# Altium PCB nrf52811_qfaa_dcdc.PcbDoc
Units mm, origin at the board's own origin, x right, y up, seen from the top; angles counter-clockwise.
Board outline 30.48 x 38.1 mm, 2 copper layers (Top Layer, Bottom Layer), stack 1.671 mm thick; 19 components, 46 nets, 122 pads, 60 vias.
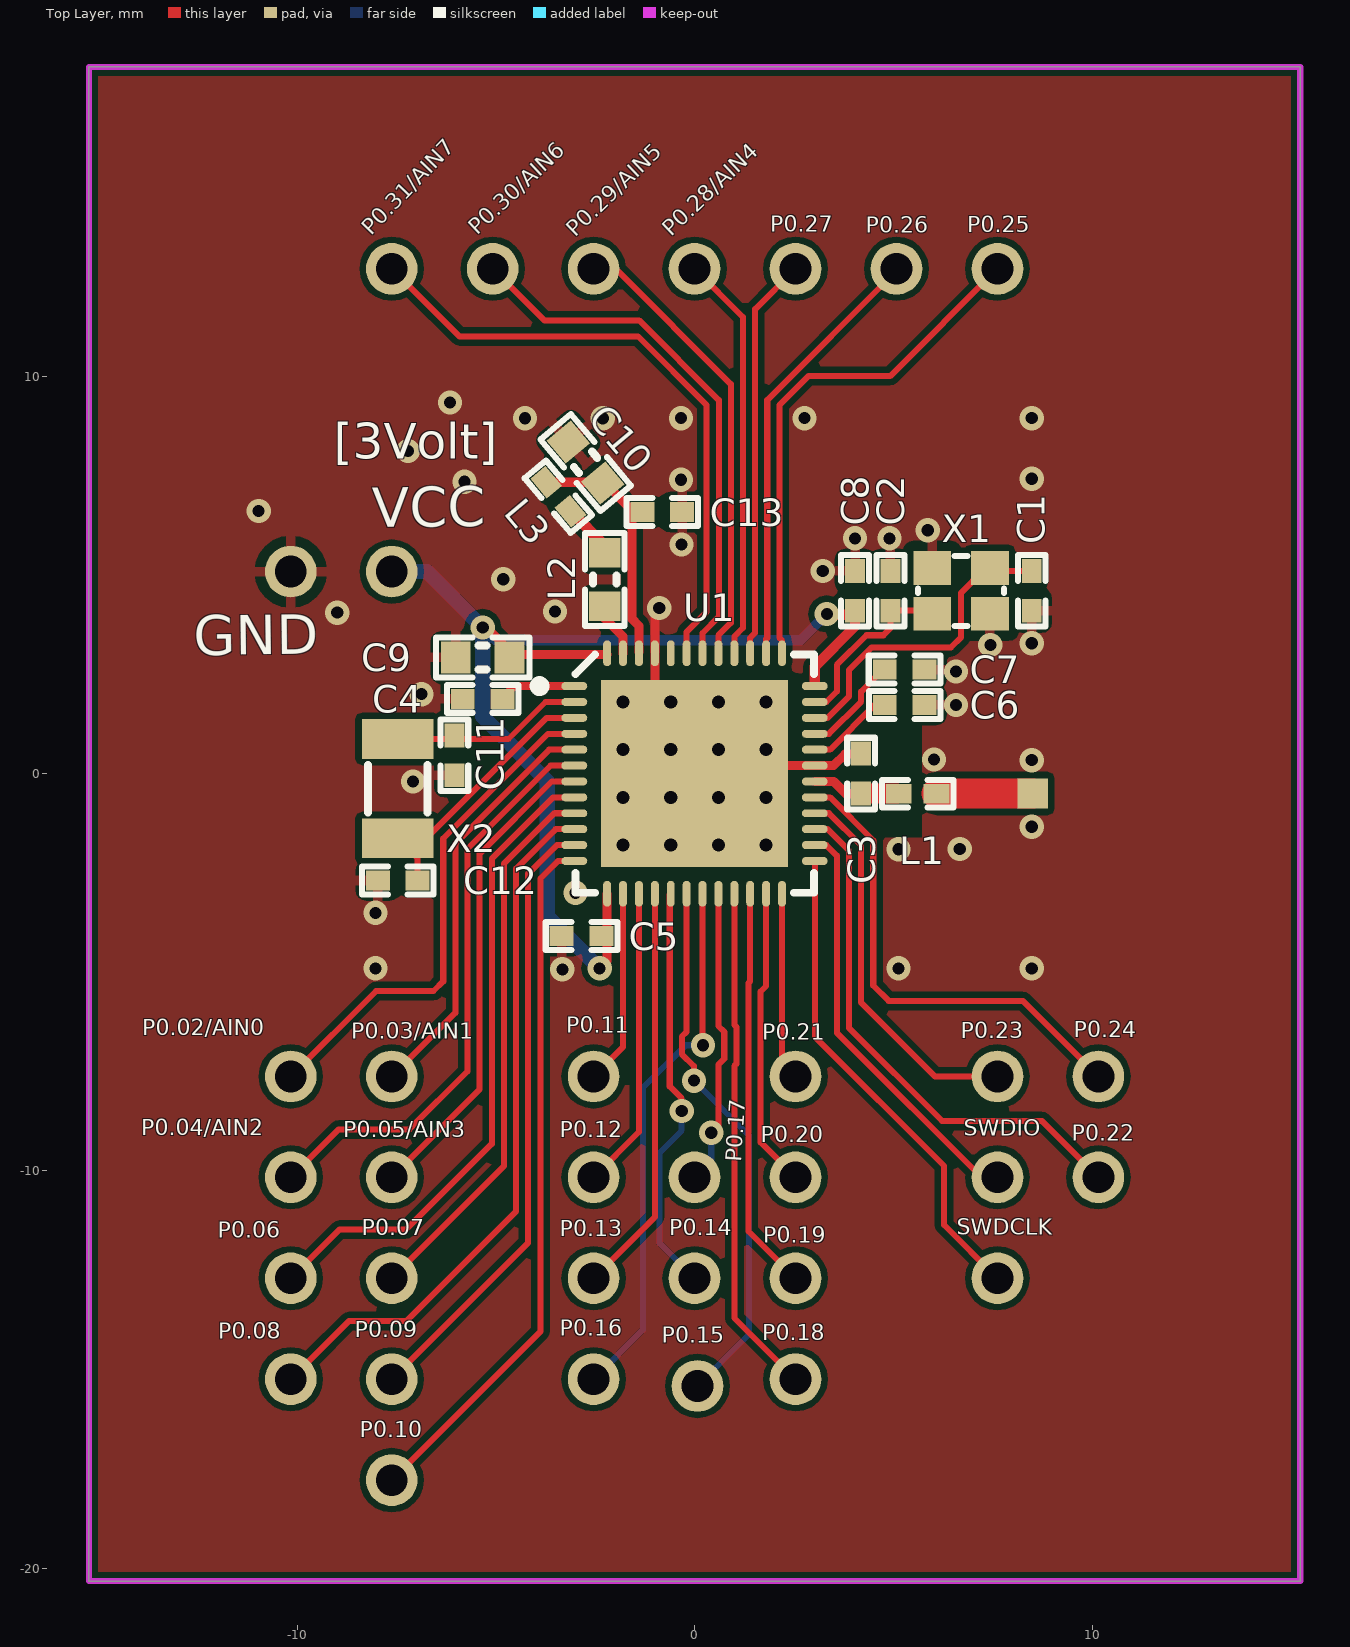
[diagram p0: Top Layer view]
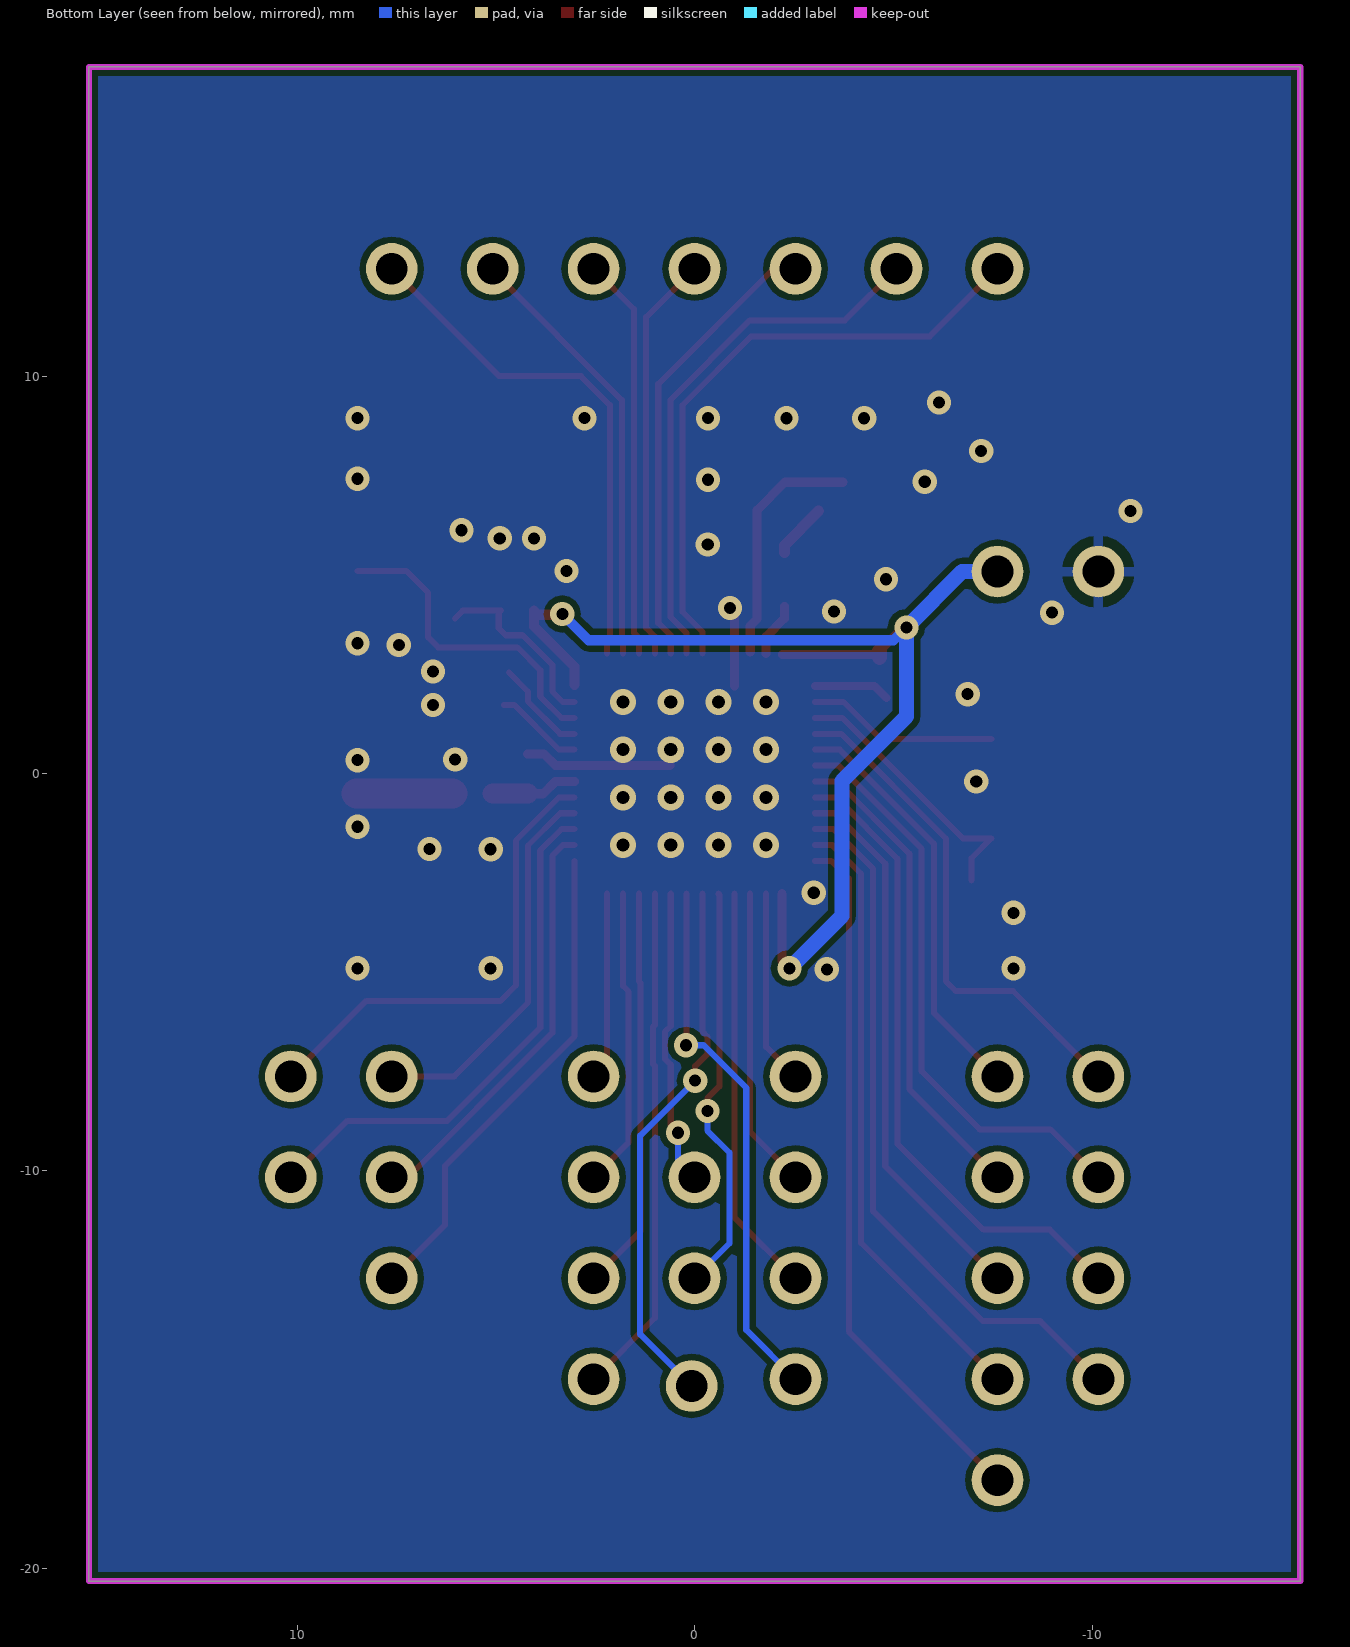
[diagram p1: Bottom Layer view, seen from below]
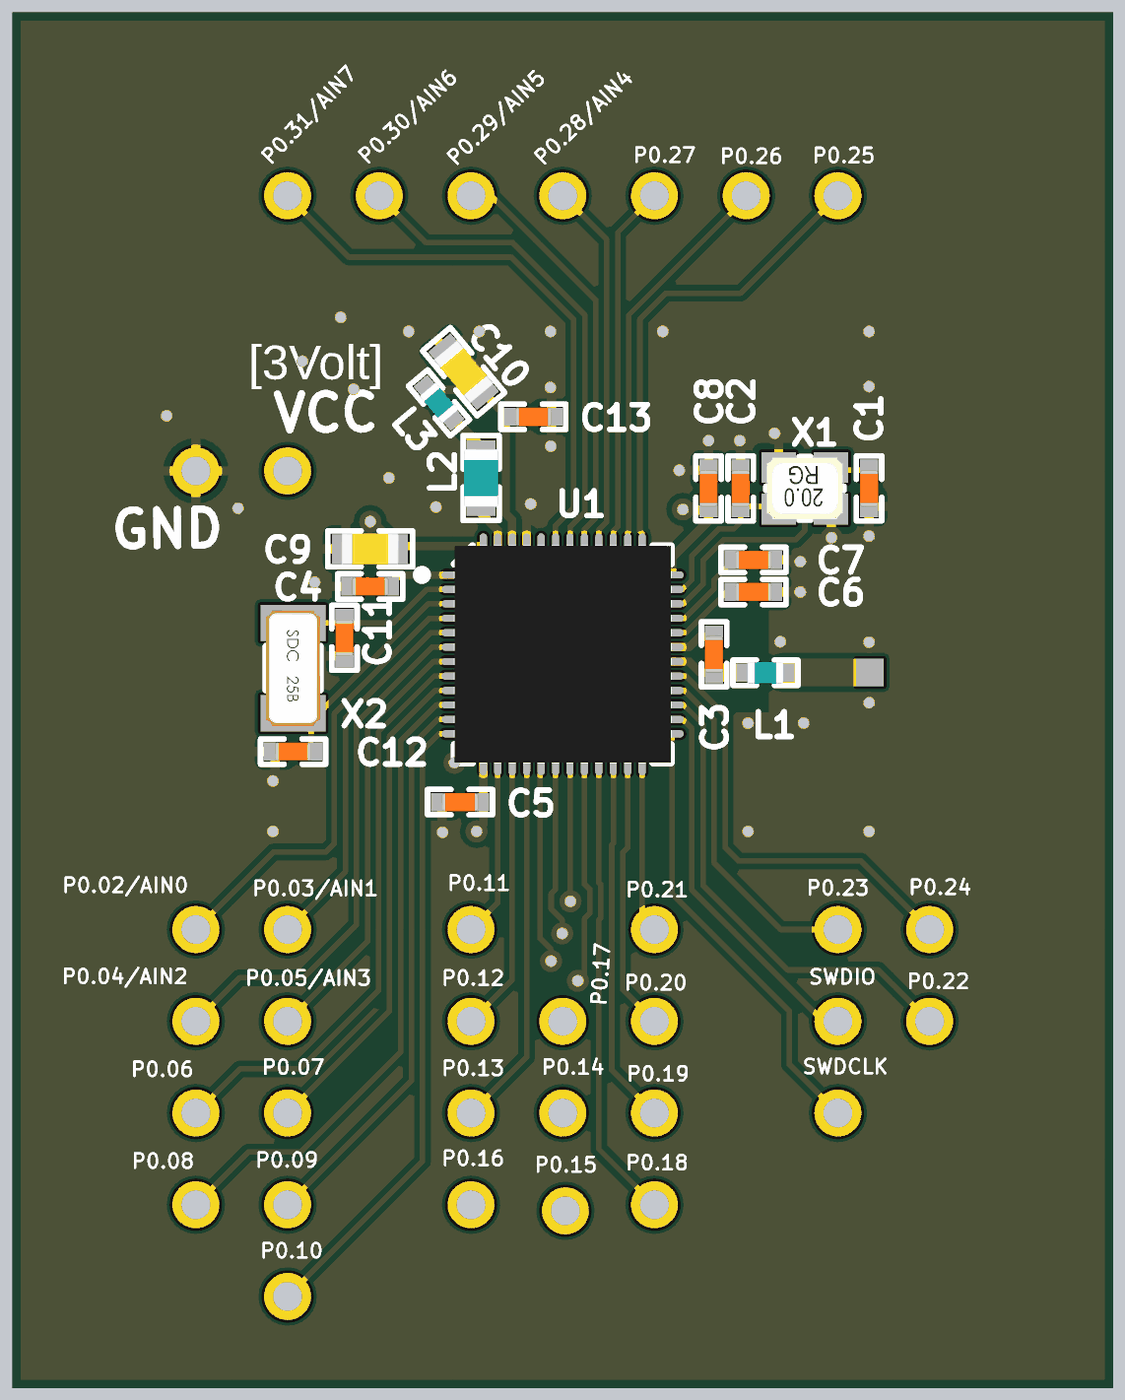
[diagram p2: 3D render of the assembled board from above, using the file's embedded part models]

## Layer stack, top to bottom
Top Solder: solder mask 0.0102, Solder Resist, Dk 3.5
Top Layer: signal copper 0.0356
Dielectric1: core 1.6002, FR-4, Dk 4.8
Bottom Layer: signal copper 0.0356
Bottom Solder: solder mask 0.0102, Solder Resist, Dk 3.5

## Board outline
-15.24,-20.32 -15.24,17.78 15.24,17.78 15.24,-20.32

## Design rules (kind name [scope] priority, off if disabled: settings)
Clearance Polygon_ANT [(InNamedPolygon('Top_Layer-GND')) or (InNamedPolygon('Bottom_Layer-GND')) vs InNet('RF')] p1: gap=0.127 ignorepadtopadclearanceinfootprint=FALSE except(0: Arc-Hole Track-Hole SMDPad-Hole THPad-Hole Via-Hole Fill-Hole Poly-Hole Region-Hole Text-Hole)
Clearance Polygon [(InNamedPolygon('Top_Layer-GND')) or (InNamedPolygon('Bottom_Layer-GND'))] p2: gap=0.254 ignorepadtopadclearanceinfootprint=FALSE except(0: Arc-Hole Track-Hole SMDPad-Hole THPad-Hole Via-Hole Fill-Hole Poly-Hole Region-Hole Text-Hole)
Clearance [All] p3: gap=0.152 ignorepadtopadclearanceinfootprint=FALSE except(0: Arc-Hole Track-Hole SMDPad-Hole THPad-Hole Via-Hole Fill-Hole Poly-Hole Region-Hole Text-Hole)
ComponentClearance [All] p1 off: gap=0.254 collisioncheckmode=3 verticalgap=0.254 showdistances=FALSE
FabricationTestPointUsage TestPointUsage [All] p1: valid=0 allowmultiple=FALSE
FabricationTestpoint Testpoint [All] p1: side=3 testpointundercomponent=TRUE minsize=1.016 maxsize=2.54 preferedsize=1.524 minholesize=0 maxholesize=1.016 preferedholesize=0.813 testpointgrid=0.025 allowsidetop=TRUE allowsidebottom=TRUE usegrid=TRUE gridtolerance=0
Height [All] p1 off: minheight=0 maxheight=25.4 prefheight=12.7
HoleSize [All] p1: absolutevalues=TRUE maxlimit=4.064 minlimit=0.305 maxpercent=80.000 minpercent=20.000
MinimumAnnularRing [All] p1 off: minimumring=0.152
PolygonConnect PolygonConnect_1 [isVia and innet(gnd)] p1: connectstyle=Direct reliefconductorwidth=0.254 reliefentries=4 polygonreliefangle="90 Angle" airgapwidth=0.254
PolygonConnect [All] p2: connectstyle=Relief reliefconductorwidth=0.254 reliefentries=4 polygonreliefangle="90 Angle" airgapwidth=0.254
RoutingVias [All] p1: holewidth=0.406 width=0.813 viastyle="Through Hole" minholewidth=0.254 minwidth=0.254 maxholewidth=0.711 maxwidth=1.27
SilkToSolderMaskClearance SilkscreenOverComponentPads [IsPad] p1: minsilkscreentomaskgap=0.254 clearancetoexposedcopper=TRUE
SolderMaskExpansion [All] p1: expansion=0.076
Width [All] p1: maxlimit=2.54 minlimit=0.152 preferedwidth=0.381 minimp=50.000000 maximp=50.000000 favimp=50.000000
24 further rules are at their usual default settings.

## Components (designator, comment, footprint, x,y, rotation, side; value= is the part's Value field where it differs from the comment)
C1 "12pF" CAPC1005X04L 8.483,4.598 r270 top
C2 "12pF" CAPC1005X04L 4.927,4.598 r90 top
C3 "0.8pF" CAPC1005X04L 4.191,0 r270 top
C4 "100nF" CAPC1005X04L -5.334,1.88 r180 top
C5 "100nF" CAPC1005X04L -2.845,-4.089 r180 top
C6 "N.C." CAPC1005X04L 5.283,1.727 r180 top
C7 "100pF" CAPC1005X04L 5.283,2.616 r0 top
C8 "100nF" CAPC1005X04L 4.038,4.598 r90 top
C9 "4.7µF" CAPC1608X06L -5.334,2.921 r180 top
C10 "1.0µF" CAPC1608X06L -2.742,7.828 r310 top
C11 "12pF" CAPC1005X04L -6.045,0.457 r270 top
C12 "12pF" CAPC1005X04L -7.468,-2.692 r180 top
C13 "N.C." CAPC1005X04L -0.813,6.579 r0 top
L1 "3.9nH" INDC1005X04L 5.613,-0.508 r0 top
L2 "10µH" INDC1608X06L -2.261,4.882 r270 top
L3 "15nH" INDC1005X04L -3.428,6.965 r310 top
U1 "nRF52811-QFAA" QFN40P600X600X90-48N 0,0 r0 top locked
X1 "32MHz" BT-XTAL_2016 6.705,4.598 r180 top
X2 "32.768kHz" XTAL_3215 -7.468,-0.381 r270 top

## Footprints (in the part's own frame and the unit in brackets; to place one, negate y for a bottom-side part, rotate by r counter-clockwise, add the part's x,y. Pads: shape width x height; smd on the part's side, far side on the other; paste and mask are expansions set on the pad)
BT-XTAL_2016 [mm] "Crystal 2.0 x 1.6 mm"
  rect 0.95x0.85 smd: 1(-0.725,-0.575) 2(0.725,-0.575) 3(0.725,0.575) 4(-0.725,0.575)
  silkscreen extent -1.08,-0.88 1.08,0.88, body extent -1.05,-0.85 1.05,0.85, height 0.56
CAPC1005X04L [mm] "Chip Capacitor, 2-Leads, Body 1.0x0.5mm, IPC High Density"
  rect 0.6x0.5 smd: 1(-0.5,0) 2(0.5,0)
  silkscreen extent -0.9,-0.35 0.9,0.35, body extent -0.51,-0.25 0.51,0.25, height 0.5
CAPC1608X06L [mm] "Chip Capacitor, 2-Leads, Body 1.6x0.8mm, IPC High Density"
  rect 0.75x0.8 smd: 1(-0.675,0) 2(0.675,0)
  silkscreen extent -1.17,-0.5 1.17,0.5, body extent -0.8,-0.43 0.8,0.43, height 0.8
INDC1005X04L [mm] "Chip Inductor, 2-Leads, Body 1.0x0.5mm, IPC High Density"
  rect 0.65x0.5 smd: 1(-0.475,0) 2(0.475,0)
  silkscreen extent -0.9,-0.35 0.9,0.35, body extent -0.5,-0.3 0.5,0.3, height 0.5
INDC1608X06L [mm] "Chip Inductor, 2-Leads, Body 1.6x0.8mm, IPC High Density"
  rect 0.75x0.8 smd: 1(-0.675,0) 2(0.675,0)
  silkscreen extent -1.17,-0.5 1.17,0.5, body extent -0.8,-0.48 0.8,0.48, height 0.8
QFN40P600X600X90-48N [mm] "QFN, 48-Leads, Body 6,0x6,0mm (max), Pitch 0,40mm, IPC Medium Density"
  oval 0.65x0.2 smd: 1(-3.025,2.2) 2(-3.025,1.8) 3(-3.025,1.4) 4(-3.025,1) 5(-3.025,0.6) 6(-3.025,0.2) 7(-3.025,-0.2) 8(-3.025,-0.6) 9(-3.025,-1) 10(-3.025,-1.4) 11(-3.025,-1.8) 12(-3.025,-2.2) 25(3.025,-2.2) 26(3.025,-1.8) 27(3.025,-1.4) 28(3.025,-1) 29(3.025,-0.6) 30(3.025,-0.2) 31(3.025,0.2) 32(3.025,0.6) 33(3.025,1) 34(3.025,1.4) 35(3.025,1.8) 36(3.025,2.2)
  oval 0.2x0.65 smd: 13(-2.2,-3.025) 14(-1.8,-3.025) 15(-1.4,-3.025) 16(-1,-3.025) 17(-0.6,-3.025) 18(-0.2,-3.025) 19(0.2,-3.025) 20(0.6,-3.025) 21(1,-3.025) 22(1.4,-3.025) 23(1.8,-3.025) 24(2.2,-3.025) 37(2.2,3.025) 38(1.8,3.025) 39(1.4,3.025) 40(1,3.025) 41(0.6,3.025) 42(0.2,3.025) 43(-0.2,3.025) 44(-0.6,3.025) 45(-1,3.025) 46(-1.4,3.025) 47(-1.8,3.025) 48(-2.2,3.025)
  rect 4.7x4.7 smd: 49(0,0)
  silkscreen extent -4.02,-3 3,3, body extent -3.02,-3.02 3.02,3.02, height 0.86
XTAL_3215 [mm] "XTAL SMD 3.2 x 1.5 mm"
  rect 1x1.8 smd: 1(-1.25,0) 2(1.25,0)
  silkscreen extent -0.6,-0.75 0.6,0.75, body extent -1.6,-0.75 1.6,0.75, height 0.81

## Part data
C1 C2 C11 C12: library part C0402-12p, "Capacitor, NP0, ±2%", Footprint Doc=0402, LatestRevisionDate=2011-05-11, Note=50V, Part Number=C0402-12p, Pin Count=2, Published=2009-05-08, Publisher="Nordic Semiconductor"
C3: library part C0402-0.8p, "Capacitor, NP0, ±5%", Footprint Doc=0402, LatestRevisionDate=2012-11-21, Note=50V, Part Number=C0402-0.8p, Pin Count=2, Published=2009-05-08, Publisher="Nordic Semiconductor"
C4 C5 C8: library part C0402-100n, "Capacitor, X7R, ±10%", Footprint Doc=0402, LatestRevisionDate=2009-11-23, Note=16V, Part Number=C0402-100n, Pin Count=2, Published=2009-05-08, Publisher="Nordic Semiconductor"
C6 C13: library part C0402-N.C., "Not mounted", Assembly="Not mounted", Footprint Doc=0402, LatestRevisionDate=2009-05-08, Part Number=C0402-N.C., Pin Count=2, Published=2009-05-08, Publisher="Nordic Semiconductor"
C7: library part C0402-100p, "Capacitor, NP0, ±5%", Footprint Doc=0402, LatestRevisionDate=2009-05-08, Note=50V, Part Number=C0402-100p, Pin Count=2, Published=2009-05-08, Publisher="Nordic Semiconductor"
C9: library part C0603-4µ7, "Capacitor, X5R, ±10%", Footprint Doc=0603, LatestRevisionDate=2009-11-23, Note=6.3V, Part Number=C0603-4µ7, Pin Count=2, Published=2009-05-08, Publisher="Nordic Semiconductor"
C10: library part C0603-1µ0, "Capacitor, X7R, ±10%", Footprint Doc=0603, LatestRevisionDate=2013-06-05, Note=16V, Part Number=C0603-1µ0, Pin Count=2, Published=2009-05-08, Publisher="Nordic Semiconductor"
L1: library part L0402-3n9, "High frequency chip inductor ±5%", Footprint Doc=0402, LatestRevisionDate=2012-09-19, Part Number=L0402-3n9, Pin Count=2, Published=2009-05-08, Publisher="Nordic Semiconductor"
L2: library part L0603-10µ, "Chip inductor, IDC,min = 50 mA, ±20%", Footprint Doc=0603, LatestRevisionDate=2012-09-19, Part Number=L0603-10µ, Pin Count=2, Published=2010-02-24, Publisher="Nordic Semiconductor"
L3: library part L0402-15n, "High frequency chip inductor ±10%", Footprint Doc=0402, LatestRevisionDate=2012-09-19, Part Number=L0402-15n, Pin Count=2, Published=2010-07-12, Publisher="Nordic Semiconductor"
U1: library part nRF52811-QFAAA0, "Multi-protocol Bluetooth Low Energy, IEEE 802.15.4, ANT and 2.4GHz proprietary system-on-chip", Manufacturer="Nordic Semiconductor", Part number IPS=N.A., Artikkelnr Noca=N.A., ComponentLink1Description=Datasheet, ComponentLink2Description="Supplier link", Footprint Doc=QFN-48, LatestRevisionDate=2019-01-30, Manufacturer Part Number=nRF52811-QFAAA0, Note="nRF52811 - QFN48 6x6 0.4mm pitch", Part Number=nRF52811-QFAAA0, Pin Count=48, Published=2019-01-30, Publisher="Nordic Semiconductor", Supplier 1="Nordic Semiconductor", Supplier Part Number 1=nRF52811-QFAAA0
X1: library part XTAL_SMD2016_32MHz_8pF_General, "XTAL SMD 2016, 32MHz, Cl=8pF, Total Tol: ±40ppm", Footprint Doc=XTAL_2016, LatestRevisionDate=2016-08-19, Part Number=XTAL_SMD2016_32MHz_8pF_General, Pin Count=4, Published=2016-08-19, Publisher="Nordic Semiconductor"
X2: library part XTAL_SMD3215_32.768kHz_9pF_General, "XTAL SMD 3215, 32.768kHz, Cl=9pF, Total Tol: ±50ppm", Footprint Doc=XTAL_3215, LatestRevisionDate=2016-08-19, Part Number=XTAL_SMD3215_32.768kHz_9pF_General, Pin Count=2, Published=2016-08-19, Publisher="Nordic Semiconductor"

## Free pads (board coordinates)
  rect 0.762x0.762 smd: 0(8.509,-0.502)
  round 1.3 hole 0.8: 3(-10.16,-15.24) 3(-10.16,-12.7) 3(-10.16,-10.16) 3(-10.16,-7.62) 3(-10.16,5.08) 3(-7.62,-17.78) 3(-7.62,-15.24) 3(-7.62,-12.7) 3(-7.62,-10.16) 3(-7.62,-7.62) 3(-7.62,5.08) 3(-7.62,12.7) 3(-5.08,12.7) 3(-2.54,-15.24) 3(-2.54,-12.7) 3(-2.54,-10.16) 3(-2.54,-7.62) 3(-2.54,12.7) 3(0,-12.7) 3(0,-10.16) 3(0,12.7) 3(0.073,-15.409) 3(2.54,-15.24) 3(2.54,-12.7) 3(2.54,-10.16) 3(2.54,-7.62) 3(2.54,12.7) 3(5.08,12.7) 3(7.62,-12.7) 3(7.62,-10.16) 3(7.62,-7.62) 3(7.62,12.7) 3(10.16,-10.16) 3(10.16,-7.62)

## Via types
v1: diameter 0.61, hole 0.305, Top Layer to Bottom Layer, tented both sides, 44 vias
v2: diameter 0.66, hole 0.33, Top Layer to Bottom Layer, tented both sides, 16 vias

## Nets (pads, with @x,y where several pads share a name; then routed paths per layer and width w, separated by ;. In a path a pad name is that pad's centre, name@x,y a point inside that pad or via, vN(x,y) a via of type N, cw(c..) or ccw(c..) an arc to the next point about the centre after c; other vN are vias at no path point)
DEC1: C4.1 U1.1 | length 1.9
  Top Layer w0.203: C4.1@-4.83,1.899 -4.529,2.2 U1.1
DEC2: C6.2 U1.32 | length 2.2
  Top Layer w0.152: U1.32 3.411,0.6 4.538,1.727 C6.2 C6.2@4.801,1.727
DEC3: C7.1 U1.33 | length 2.4
  Top Layer w0.152: U1.33 3.38,1 4.191,1.811 4.191,2.062 C7.1@4.675,2.546
DEC4: C10.2 C13.1 L3.1 U1.46 | length 6.1
  Top Layer w0.229: L3.1 -2.274,7.329 -1.575,6.629 -1.575,3.891 -1.4,3.717 U1.46@-1.4,3.056
GND: C1.2 C2.2 C3.1 C4.2 C5.2 C6.1 C7.2 C8.2 C9.2 C10.1 C11.2 C12.2 C13.2 pad.3@-10.16,5.08 U1.31 U1.45 U1.49 X1.2 X1.4 | length 5.6
  Top Layer w0.229: U1.49@-1,2.2 U1.45 v1@-1,4.14 ; U1.49@0.618,0.203 3.499,0.203 3.786,0.49 C3.1@4.199,0.49
  other v1: -3.327,-4.928 -8.026,-4.902 5.131,-4.902 8.484,-4.902 -8.026,-3.505 -2.997,-3 5.131,-1.905 6.671,-1.901 8.484,-1.34 -7.087,-0.203 8.484,0.337 6.024,0.35 6.579,1.727 -6.871,1.996 6.579,2.565 7.442,3.231 8.483,3.277 -8.992,4.047 -3.511,4.08 -0.889,4.166 -4.814,4.888 3.226,5.098 -0.33,5.766 4.039,5.918 4.902,5.918 5.867,6.122 -10.969,6.609 -5.791,7.341 -0.34,7.391 8.484,7.417 -7.21,8.119 -4.267,8.941 -2.311,8.941 -0.34,8.941 2.769,8.941 8.484,8.941 -6.151,9.333
  other v2: -1.8,-1.8 -0.6,-1.8 0.6,-1.8 1.8,-1.8 -1.8,-0.6 -0.6,-0.6 0.6,-0.6 1.8,-0.6 -1.8,0.6 -0.6,0.6 0.6,0.6 1.8,0.6 -1.8,1.8 -0.6,1.8 0.6,1.8 1.8,1.8
NetC3_2: C3.2 L1.1 U1.30 | length 2.2
  Top Layer w0.229: U1.30 3.5,-0.2 3.81,-0.51 C3.2@4.199,-0.51
  Top Layer w0.508: C3.2@4.191,-0.505 L1.1@5.088,-0.505
NetL2_1: L2.1 L3.2 | length 1.4
  Top Layer w0.279: L3.2 -2.261,5.738 L2.1
NetL2_2: L2.2 U1.47 | length 1.4
  Top Layer w0.229: L2.2 -2.261,3.905 -1.8,3.445 U1.47
P0.00/XL1: C11.1 U1.2 X2.1 | length 4.8
  Top Layer w0.152: X2.1 -4.683,0.869 -3.752,1.8 U1.2
P0.01/XL2: C12.1 U1.3 X2.2 | length 7
  Top Layer w0.152: C12.1 -6.968,-2.131 X2.2 -6.752,-1.631 -3.721,1.4 U1.3
P0.02/AIN0: pad.3@-10.16,-7.62 U1.4 | length 12.8
  Top Layer w0.152: pad.3@-10.16,-7.62 -8.012,-5.472 -6.569,-5.472 -6.325,-5.228 -6.325,-1.636 -3.689,1 U1.4
P0.03/AIN1: pad.3@-7.62,-7.62 U1.5 | length 10.5
  Top Layer w0.152: pad.3@-7.62,-7.62 -6.019,-6.019 -6.019,-1.762 -3.657,0.6 U1.5
P0.04/AIN2: pad.3@-10.16,-10.16 U1.6 | length 14.7
  Top Layer w0.152: pad.3@-10.16,-10.16 -8.955,-8.955 -7.174,-8.955 -5.714,-7.495 -5.714,-1.889 -3.625,0.2 U1.6
P0.05/AIN3: pad.3@-7.62,-10.16 U1.7 | length 12.2
  Top Layer w0.152: pad.3@-7.62,-10.16 -5.406,-7.946 -5.406,-2.016 -3.591,-0.2 U1.7
P0.06: pad.3@-10.16,-12.7 U1.8 | length 16.3
  Top Layer w0.152: pad.3@-10.16,-12.7 -8.938,-11.478 -7.264,-11.478 -5.102,-9.316 -5.102,-2.142 -3.56,-0.6 U1.8
P0.07: pad.3@-7.62,-12.7 U1.9 | length 13.9
  Top Layer w0.152: pad.3@-7.62,-12.7 -4.797,-9.877 -4.797,-2.268 -3.529,-1 U1.9
P0.08: pad.3@-10.16,-15.24 U1.10 | length 17.9
  Top Layer w0.152: pad.3@-10.16,-15.24 -8.7,-13.78 -7.257,-13.78 -4.492,-11.015 -4.492,-2.395 -3.497,-1.4 U1.10
P0.09: pad.3@-7.62,-15.24 U1.11 | length 15.6
  Top Layer w0.152: pad.3@-7.62,-15.24 -4.187,-11.807 -4.187,-2.521 -3.466,-1.8 U1.11
P0.10: pad.3@-7.62,-17.78 U1.12 | length 17.7
  Top Layer w0.152: pad.3@-7.62,-17.78 -3.882,-14.042 -3.882,-2.647 -3.435,-2.2 U1.12
P0.11: pad.3@-2.54,-7.62 U1.14 | length 4.9
  Top Layer w0.152: pad.3@-2.54,-7.62 -1.8,-6.88 U1.14
P0.12: pad.3@-2.54,-10.16 U1.15 | length 7.6
  Top Layer w0.152: pad.3@-2.54,-10.16 -1.4,-9.02 U1.15
P0.13: pad.3@-2.54,-12.7 U1.16 | length 10.3
  Top Layer w0.152: pad.3@-2.54,-12.7 -1,-11.16 U1.16
P0.14: pad.3@0,-12.7 U1.17 | length 10.4
  Top Layer w0.152: U1.17 -0.625,-3.05 -0.625,-7.872 -0.324,-8.173 v1(-0.324,-8.493)
  Bottom Layer w0.152: v1(-0.324,-8.493) -0.324,-8.986 -0.879,-9.541 -0.879,-11.821 pad.3@0,-12.7
P0.15: pad.3@0.073,-15.409 U1.18 | length 13.7
  Top Layer w0.152: U1.18 -0.202,-3.027 -0.202,-6.499 -0.32,-6.617 -0.32,-7.059 -0.015,-7.364 v1(-0.015,-7.728)
  Bottom Layer w0.152: v1(-0.015,-7.728) 1.37,-9.113 1.37,-14.112 pad.3@0.073,-15.409
P0.16: pad.3@-2.54,-15.24 U1.19 | length 13.6
  Top Layer w0.152: U1.19 0.2,-6.824 v1(0.214,-6.838)
  Bottom Layer w0.152: pad.3@-2.54,-15.24 -1.301,-14.001 -1.301,-7.912 -0.227,-6.838 v1(0.214,-6.838)
P0.17: pad.3@0,-10.16 U1.20 | length 7.5
  Top Layer w0.152: v1(0.42,-9.038) 0.6,-8.857 0.6,-7.323 0.747,-7.176 0.747,-6.877 0.747,-6.499 0.6,-6.352 U1.20
  Bottom Layer w0.152: pad.3@0,-10.16 0.42,-9.74 v1(0.42,-9.038)
P0.18: pad.3@2.54,-15.24 U1.21 | length 12.9
  Top Layer w0.152: U1.21 1,-6.321 1.052,-6.373 1.052,-7.004 1.052,-7.302 1,-7.354 1,-13.7 pad.3@2.54,-15.24
P0.19: pad.3@2.54,-12.7 U1.22 | length 10.2
  Top Layer w0.152: U1.22 1.4,-5.232 1.357,-5.276 1.357,-6.247 1.357,-7.13 1.357,-11.517 pad.3@2.54,-12.7
P0.20: pad.3@2.54,-10.16 U1.23 | length 7.6
  Top Layer w0.152: U1.23 1.8,-5.346 1.661,-5.485 1.661,-6.12 1.661,-7.256 1.661,-9.281 pad.3@2.54,-10.16
P0.21: pad.3@2.54,-7.62 U1.24 | length 4.7
  Top Layer w0.152: U1.24 2.2,-7.28 pad.3@2.54,-7.62
P0.22: pad.3@10.16,-10.16 U1.27 | length 13.4
  Top Layer w0.152: U1.27 3.349,-1.4 3.883,-1.934 3.883,-6.396 6.225,-8.738 8.738,-8.738 pad.3@10.16,-10.16
P0.23: pad.3@7.62,-7.62 U1.28 | length 9.7
  Top Layer w0.152: U1.28 3.38,-1 4.191,-1.811 4.191,-5.766 6.045,-7.62 pad.3@7.62,-7.62
P0.24: pad.3@10.16,-7.62 U1.29 | length 12.2
  Top Layer w0.152: U1.29 3.411,-0.6 4.496,-1.685 4.496,-5.334 4.882,-5.72 8.26,-5.72 pad.3@10.16,-7.62
P0.25: pad.3@7.62,12.7 U1.37 | length 13.2
  Top Layer w0.152: U1.37 2.2,3.351 2.134,3.417 2.134,9.271 2.863,10 4.92,10 pad.3@7.62,12.7
P0.26: pad.3@5.08,12.7 U1.38 | length 11
  Top Layer w0.152: U1.38 1.8,3.382 1.829,3.411 1.829,9.397 5.08,12.648 pad.3@5.08,12.7
P0.27: pad.3@2.54,12.7 U1.39 | length 10.1
  Top Layer w0.152: U1.39 1.4,3.413 1.524,3.537 1.524,11.684 pad.3@2.54,12.7
P0.28/AIN4: pad.3@0,12.7 U1.40 | length 10.3
  Top Layer w0.152: pad.3@0,12.7 1.219,11.481 1.219,3.663 1,3.444 U1.40
P0.29/AIN5: pad.3@-2.54,12.7 U1.41 | length 11.6
  Top Layer w0.152: pad.3@-2.54,12.7 -1.986,12.7 0.914,9.8 0.914,3.79 0.6,3.475 U1.41
P0.30/AIN6: pad.3@-5.08,12.7 U1.42 | length 13.6
  Top Layer w0.152: pad.3@-5.08,12.7 -3.78,11.4 -1.393,11.4 0.61,9.397 0.61,3.944 0.2,3.534 U1.42
P0.31/AIN7: pad.3@-7.62,12.7 U1.43 | length 15.8
  Top Layer w0.152: pad.3@-7.62,12.7 -5.92,11 -1.424,11 0.305,9.271 0.305,4.07 -0.2,3.565 U1.43
RF: L1.2 pad.0 | length 2.4
  Top Layer w0.762: L1.2@6.096,-0.502 pad.0
SWDCLK: pad.3@7.62,-12.7 U1.25 | length 12.4
  Top Layer w0.152: U1.25 3.025,-6.622 6.276,-9.873 6.276,-11.356 pad.3@7.62,-12.7
SWDIO: pad.3@7.62,-10.16 U1.26 | length 10.8
  Top Layer w0.152: U1.26 3.315,-1.8 3.579,-2.064 3.579,-6.522 7.384,-10.328 7.452,-10.328 pad.3@7.62,-10.16
VDD_NRF: C5.1 C8.1 C9.1 pad.3@-7.62,5.08 U1.13 U1.36 U1.48 | length 30.3
  Top Layer w0.229: v1(-5.33,3.677) -5.247,3.677 -4.655,3.085 -4.57,3 U1.48@-2.21,3 ; v1(-2.388,-4.902) -2.2,-4.715 U1.13
  Top Layer w0.254: U1.36@3.023,2.227 3.023,2.688 4.038,3.704 C8.1@4.038,3.996 ; v1(3.327,4.013) 3.345,3.996 C8.1@4.038,3.996 ; C8.1 C8.1@4.038,3.996
  Top Layer w0.381: C9.1@-4.655,2.915 C9.1@-4.655,3.085 ; v1@-2.461,-4.902 v1(-2.388,-4.902)
  Bottom Layer w0.254: v1(-5.33,3.677) -5.006,3.353 2.667,3.353 v1(3.327,4.013)
  Bottom Layer w0.381: pad.3@-7.62,5.08 -6.733,5.08 v1(-5.33,3.677) -5.33,1.439 -3.707,-0.184 -3.707,-3.583 v1(-2.388,-4.902)
XC1: C1.1 U1.34 X1.1 | length 8
  Top Layer w0.152: U1.34 3.349,1.4 3.883,1.934 3.883,2.603 4.456,3.175 6.451,3.175 6.705,3.429 6.705,4.547 7.256,5.098 C1.1
XC2: C2.1 U1.35 X1.3 | length 4.7
  Top Layer w0.152: U1.35 3.315,1.8 3.579,2.064 3.579,2.733 4.326,3.48 4.75,3.48 4.927,3.657 C2.1@4.927,4.09 ; C2.1@4.877,4.098 C2.1 5.833,4.098 X1.3@6.033,3.898
pads on no net: U1.44

## Polygon pours and split planes (outlines as drawn)
GND on Bottom Layer "Bottom Layer-GND" (solid, remove dead copper, pour order 0): 15.24,17.78 15.24,-20.32 -15.24,-20.32 -15.24,17.78
GND on Top Layer "Top Layer-GND" (solid, remove dead copper, pour order 2): -15.24,17.78 14.91,17.78 15.24,17.45 15.24,-20.32 -14.774,-20.32 -15.007,-20.087

## Keep-outs
Keep-Out Layer:
  the board outline again, w0.152

## Other copper
Top Layer:
  pour cut-out: 5.715,-1.6 2.972,-1.6 2.972,1.295 5.715,1.295

## Silkscreen, mask and mechanical layers (free items; w line width, h text height)
Top Overlay:
  text "P0.27" at 1.903,13.636 h0.4
  text "P0.25" at 6.866,13.625 h0.4
  text "P0.26" at 4.308,13.603 h0.4
  text "P0.31/AIN7" at -8.131,13.514 h0.4 r46.19
  text "P0.30/AIN6" at -5.464,13.526 h0.4 r43.23
  text "P0.29/AIN5" at -3.005,13.483 h0.4 r43.86
  text "P0.28/AIN4" at -0.589,13.493 h0.4 r43.65
  text "[3Volt]" at -9.078,7.623 h1.52
  text "VCC" at -8.115,6.196 h1 r0.68
  text "GND" at -12.602,2.981 h1 r0.68
  text "P0.11" at -3.234,-6.522 h0.4
  text "P0.02/AIN0" at -13.904,-6.581 h0.4
  text "P0.24" at 9.537,-6.637 h0.4
  text "P0.23" at 6.703,-6.655 h0.4
  text "P0.03/AIN1" at -8.643,-6.67 h0.4
  text "P0.21" at 1.7,-6.705 h0.4
  text "P0.04/AIN2" at -13.919,-9.107 h0.4
  text "SWDIO" at 6.773,-9.12 h0.4
  text "P0.05/AIN3" at -8.836,-9.152 h0.4
  text "P0.12" at -3.397,-9.152 h0.4
  text "P0.22" at 9.484,-9.243 h0.4
  text "P0.20" at 1.661,-9.281 h0.4
  text "P0.17" at 1.18,-9.776 h0.4 r86.18
  text "SWDCLK" at 6.597,-11.602 h0.4
  text "P0.07" at -8.376,-11.619 h0.4
  text "P0.14" at -0.633,-11.619 h0.4
  text "P0.13" at -3.397,-11.649 h0.4
  text "P0.06" at -12.002,-11.678 h0.4
  text "P0.19" at 1.725,-11.803 h0.4
  text "P0.16" at -3.397,-14.145 h0.4
  text "P0.09" at -8.554,-14.19 h0.4
  text "P0.08" at -11.987,-14.219 h0.4
  text "P0.18" at 1.699,-14.263 h0.4
  text "P0.15" at -0.826,-14.324 h0.4
  text "P0.10" at -8.42,-16.701 h0.4

## Dimensions
15.24,17.78 to 15.24,-20.32 on Mechanical 3

## Text inside footprints (layer, text, board x,y; h text height)
C9: Mechanical 3 "Designator" at -7.802,2.787 h0.38
C12: Mechanical 3 "Designator" at -7.993,-2.967 h0.3 r0.19
X2: Mechanical 3 "Designator" at -7.468,1.219 h0.38 r270